# Altium PCB УШЯИ 758725.629-2.PcbDoc (part 1 of 2)
Units mm, origin at the board's own origin, x right, y up, seen from the top; angles counter-clockwise.
Board outline 110 x 150 mm, 2 copper layers (Top Layer, Bottom Layer), stack 1.569 mm thick; 205 components, 137 nets, 716 pads, 161 vias.
Unrouted connection lines stored in the file: 8.
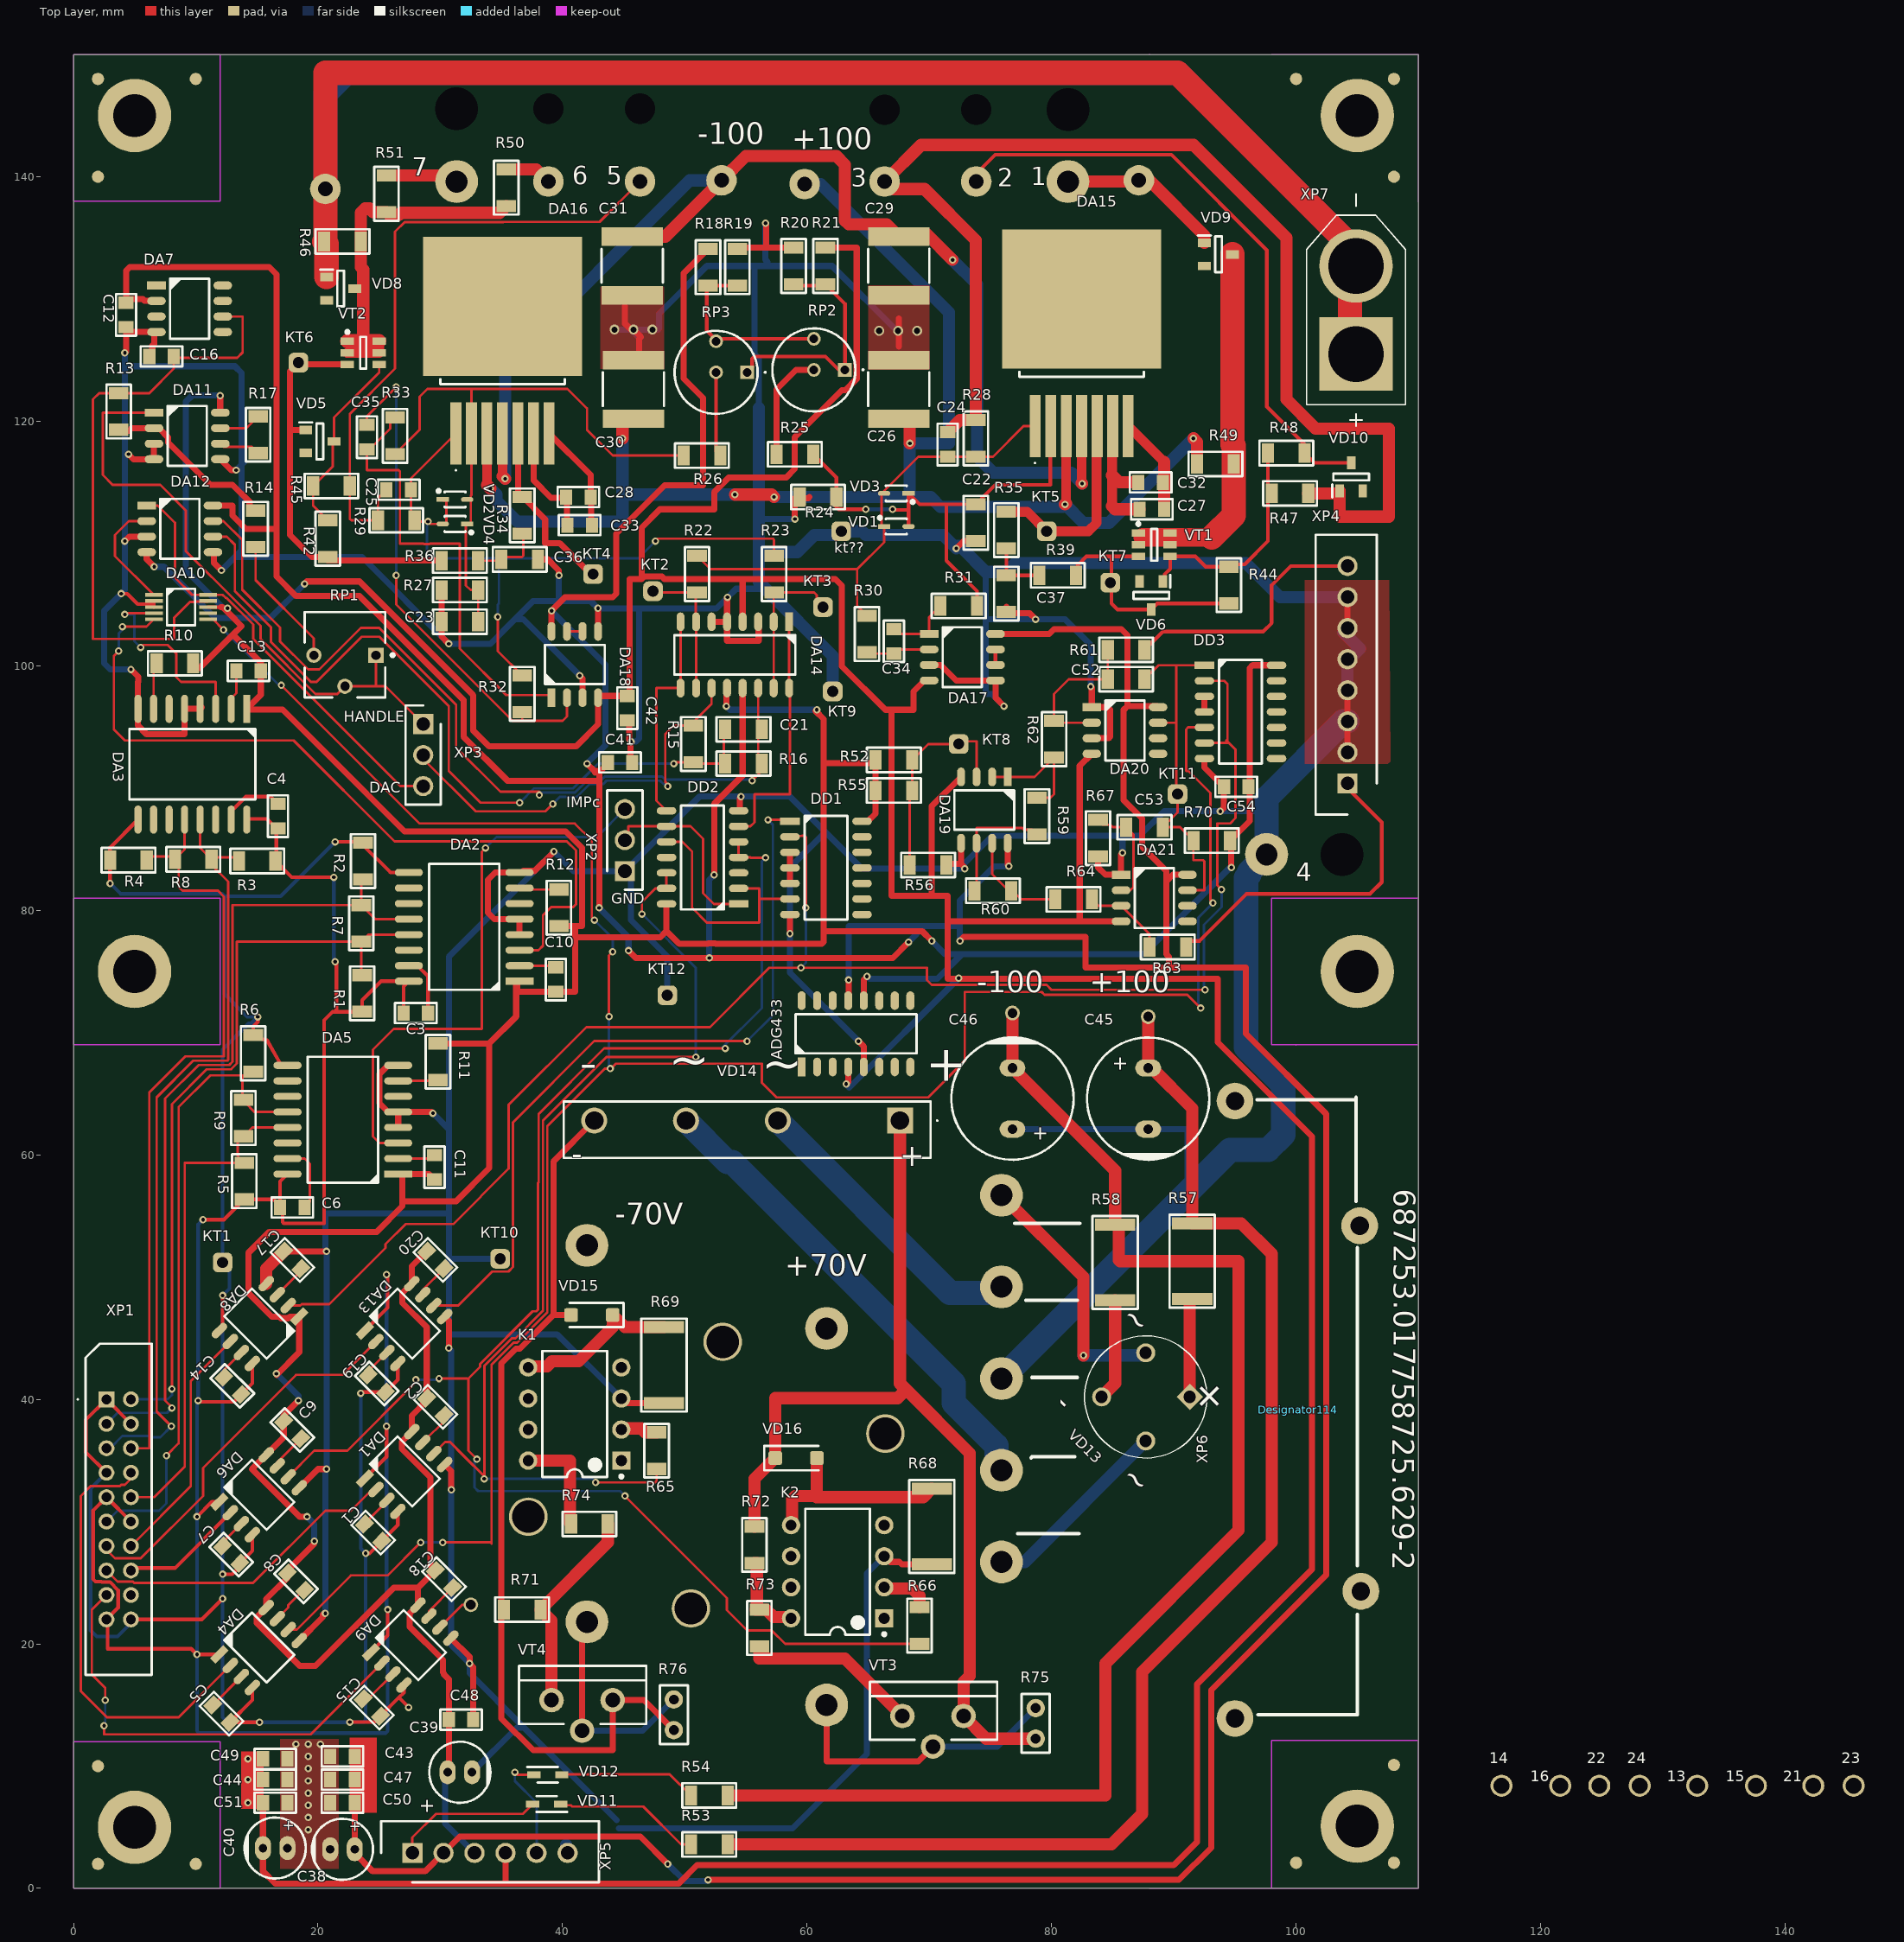
[diagram p0: Top Layer view]
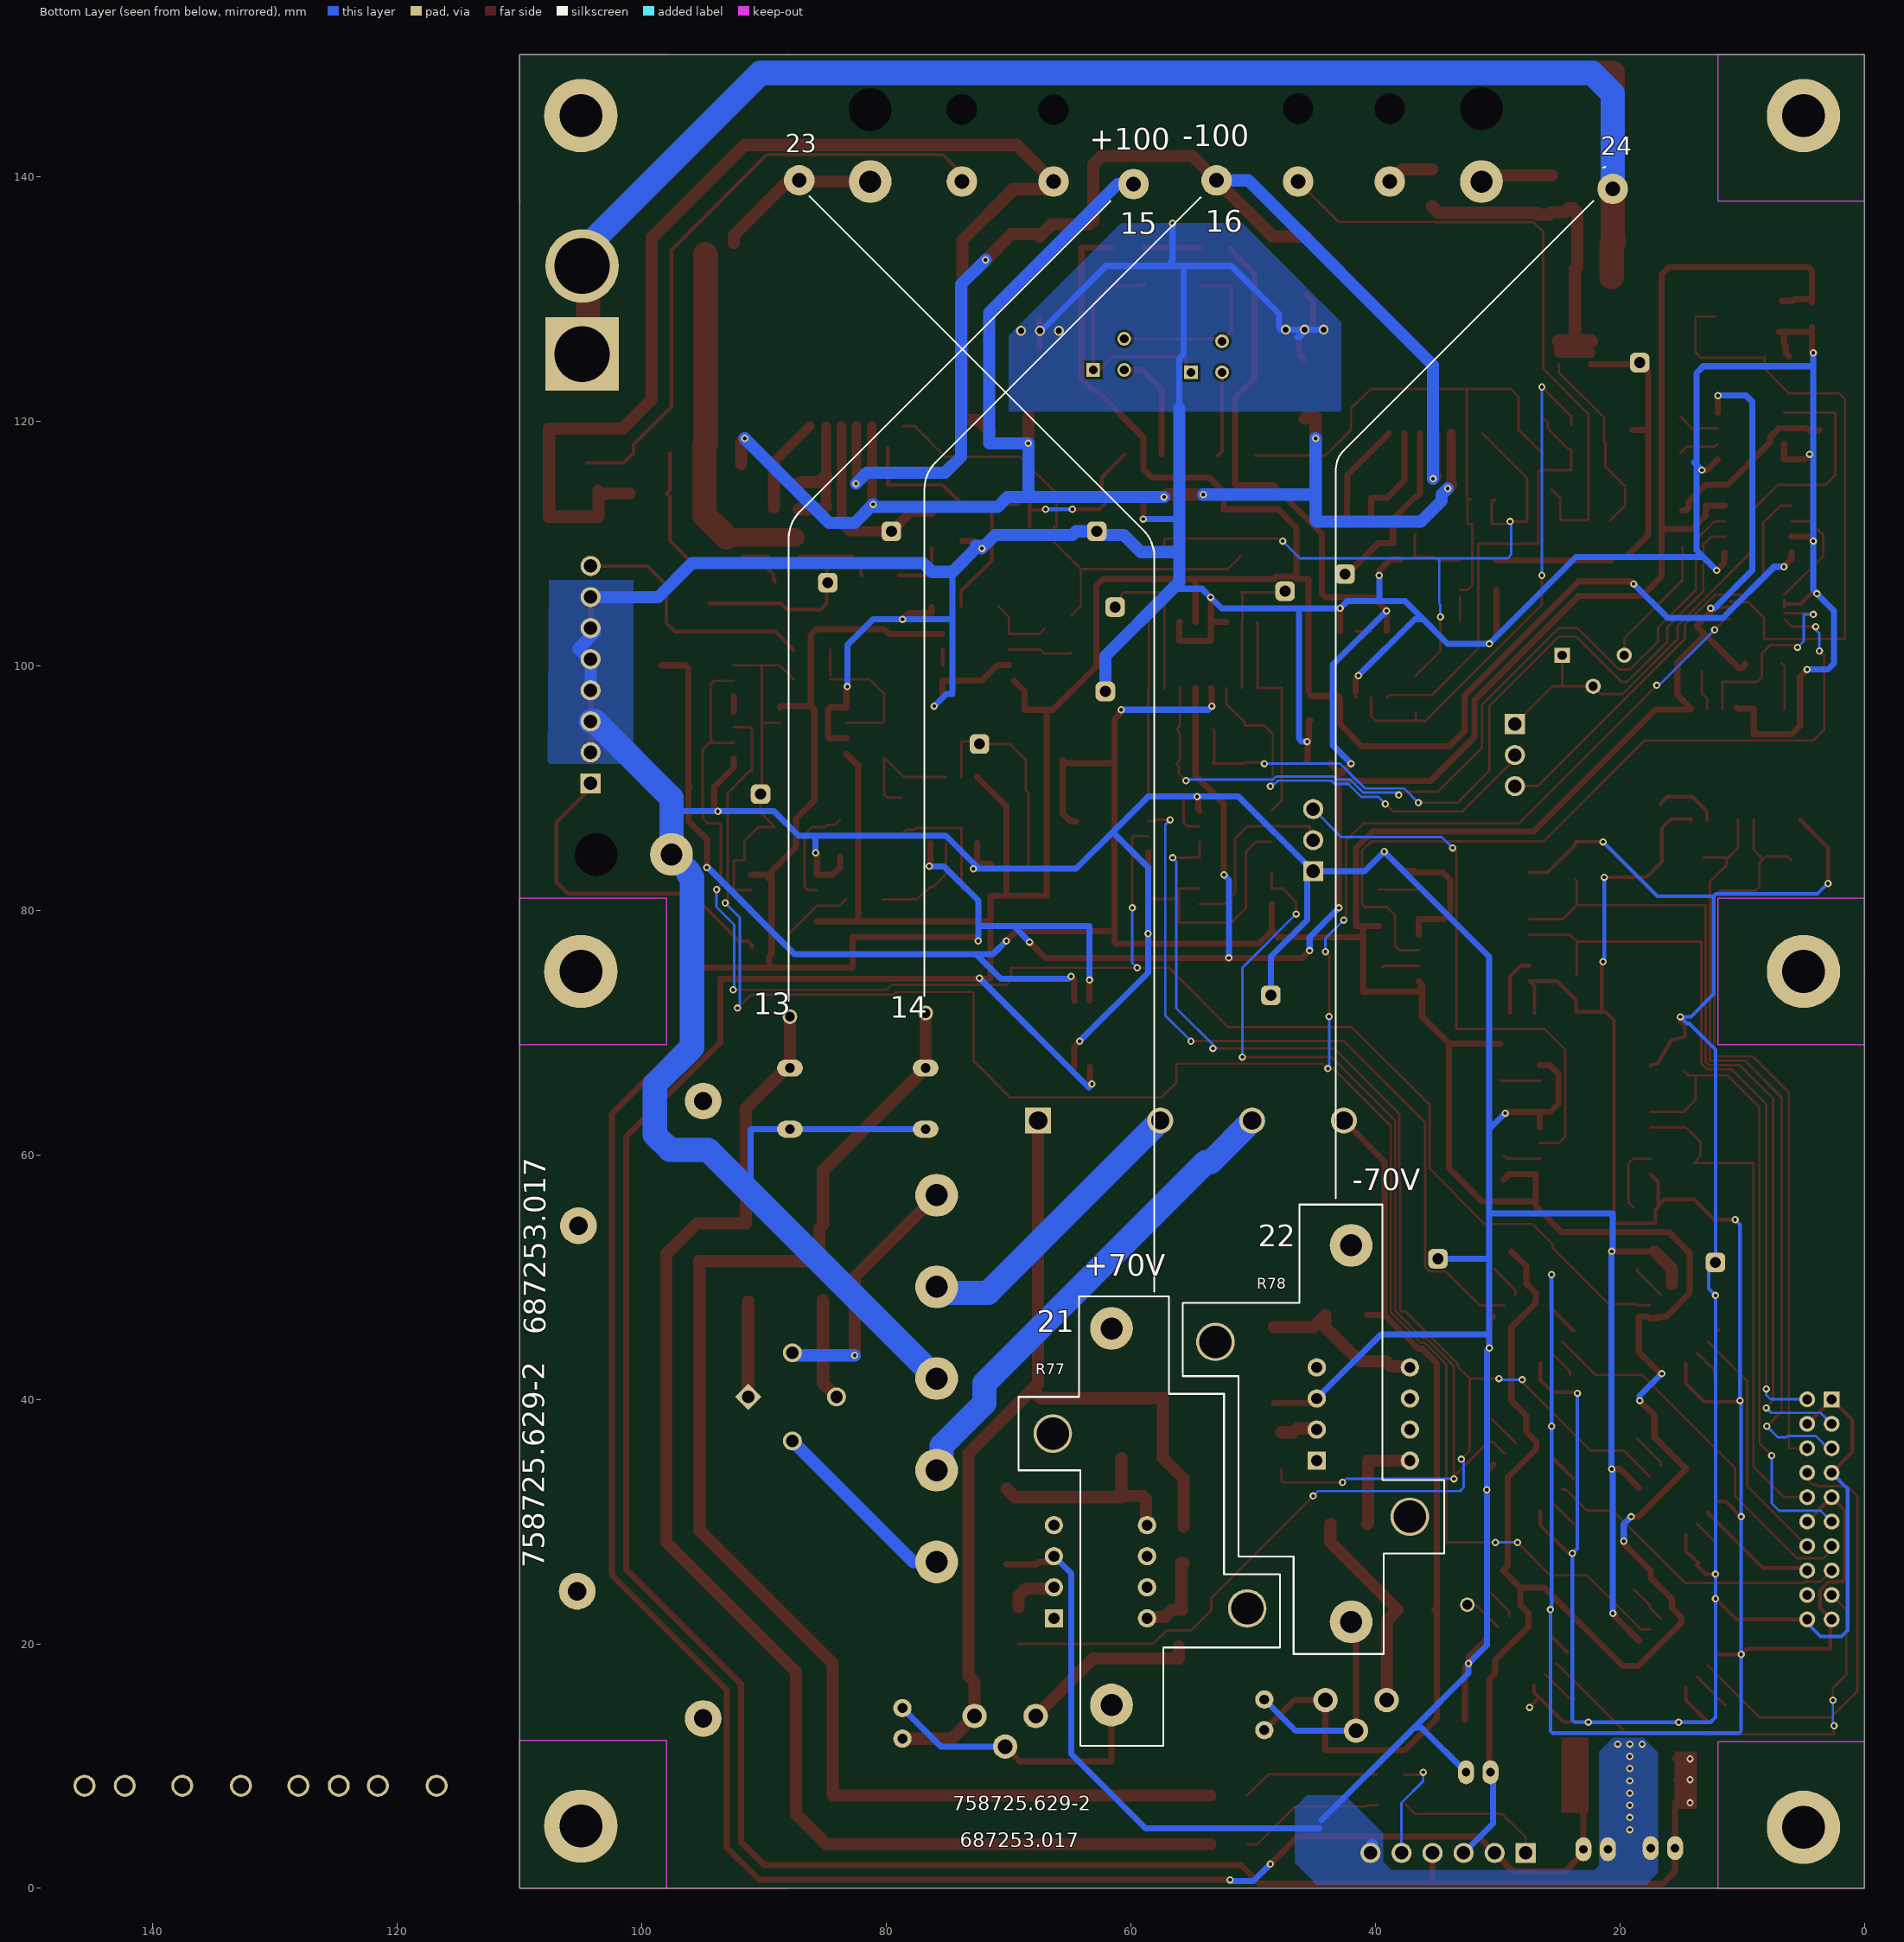
[diagram p1: Bottom Layer view, seen from below]
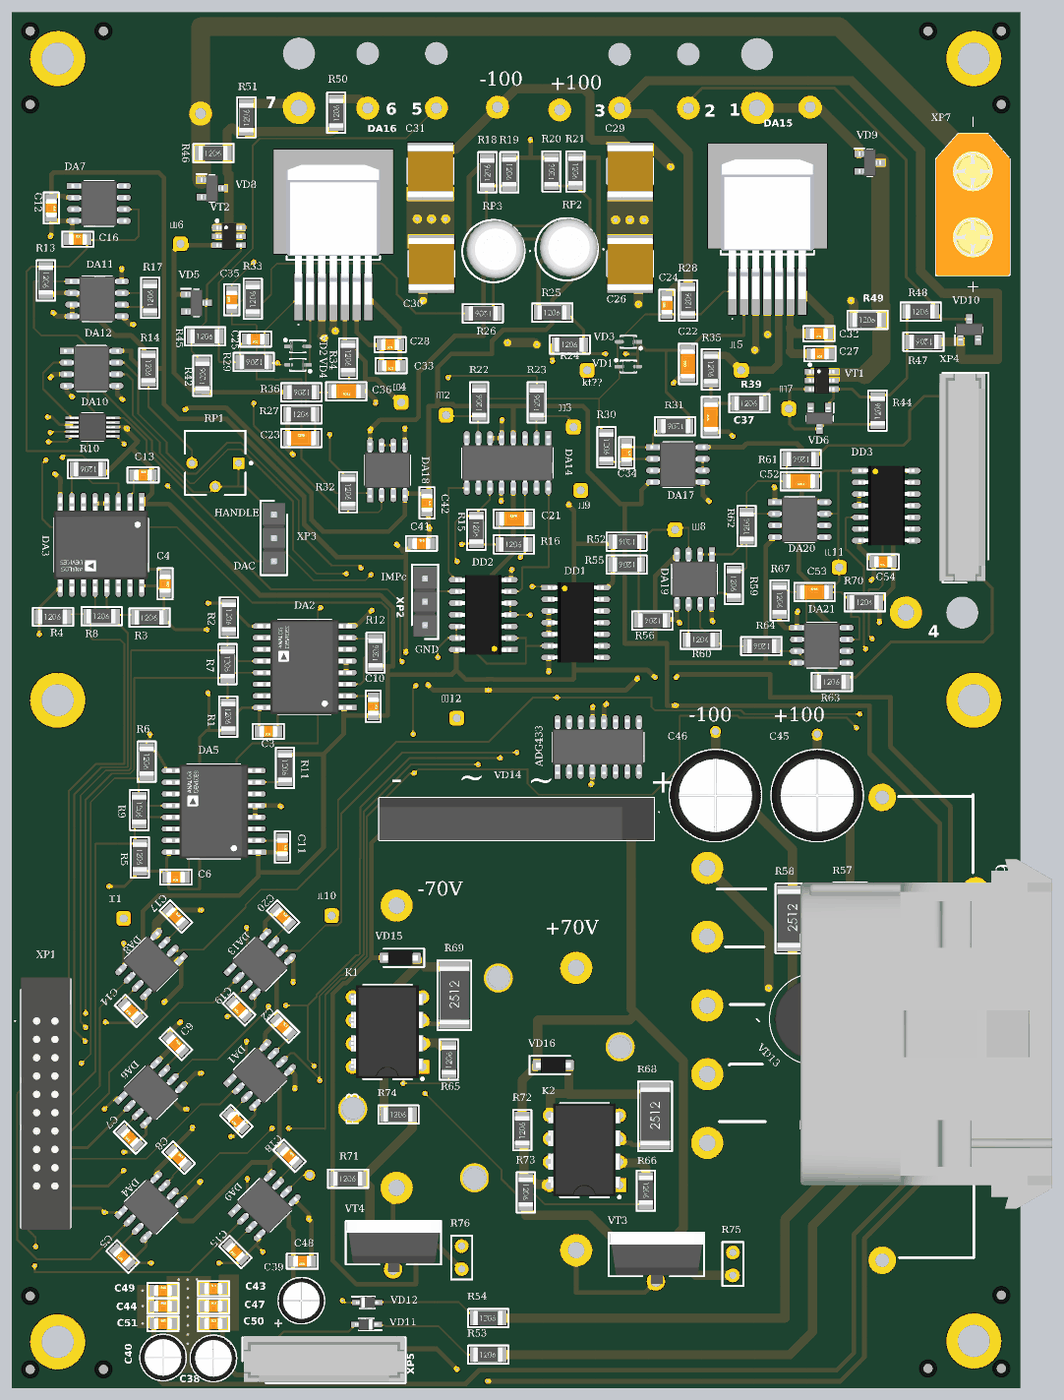
[diagram p3: 3D render of the assembled board from above, using the file's embedded part models]

## Layer stack, top to bottom
Top Solder: solder mask 0.0254, SM-001, Dk 4
Top Layer: signal copper 0.035
Dielectric 1: core 1.4986, Core-043, Dk 4.3
Bottom Layer: signal copper 0.035
Bottom Solder: solder mask 0.0254, SM-001, Dk 4

## Board outline
0,0 110,0 110,150 0,150

## Design rules (kind name [scope] priority, off if disabled: settings)
Clearance Clearance_1 [(InNet('-100') or InNet('-70') or InNet('+70') or InNet('+100'))] p1: gap=0.7 ignorepadtopadclearanceinfootprint=TRUE except(0.5: Arc-SMDPad Arc-THPad Track-SMDPad Track-THPad SMDPad-SMDPad SMDPad-THPad THPad-THPad)
Clearance Clearance_3 [InComponent('DA10')] p2: gap=0.2 ignorepadtopadclearanceinfootprint=TRUE
Clearance Clearance_2 [(InNet('+3.3n') or InNet('-15') or InNet('+5') or InNet('+15') or InNet('+5n'))] p3: gap=0.5 ignorepadtopadclearanceinfootprint=TRUE except(0.3: Arc-SMDPad Track-SMDPad)
Clearance [All] p4: gap=0.15 ignorepadtopadclearanceinfootprint=TRUE except(0.2: Arc-Fill Arc-Poly Arc-Region Track-Fill Track-Poly Track-Region SMDPad-Fill SMDPad-Poly SMDPad-Region THPad-Fill THPad-Poly THPad-Region Via-Fill Via-Poly Via-Region Fill-Fill Fill-Poly Fill-Region Poly-Poly Poly-Region Region-Region)
Height [All] p1: minheight=0 maxheight=40 prefheight=12.7
HoleSize [All] p1: absolutevalues=TRUE maxlimit=5 minlimit=0.025 maxpercent=80.000 minpercent=20.000
MinimumSolderMaskSliver [All] p1: minsoldermaskwidth=0.1
PlaneClearance [All] p1: clearance=0.5
PlaneConnect [All] p1: planeconnectstyle=Direct reliefexpansion=0.508 reliefentries=4 reliefconductorwidth=0.254 reliefairgap=0.254
PolygonConnect [All] p1: connectstyle=Direct reliefconductorwidth=0.254 reliefentries=4 polygonreliefangle="90 Angle" airgapwidth=0.254
RoutingVias [All] p1: holewidth=0.3 width=0.6 viastyle="Through Hole" minholewidth=0.3 minwidth=0.6 maxholewidth=0.8 maxwidth=1.5
SilkToSilkClearance [All] p1: silktosilkclearance=0.1
SilkToSolderMaskClearance [IsPad] p1: minsilkscreentomaskgap=0.1 clearancetoexposedcopper=TRUE
SolderMaskExpansion [All] p1: expansion=0.102 istentingtop=FALSE
SupplyNets "Schematic Supply Nets_28" [InNet('-100V')] p1: voltage=0.000
SupplyNets "Schematic Supply Nets_27" [InNet('+100V')] p2: voltage=0.000
SupplyNets "Schematic Supply Nets_22" [InNet('-70V')] p3: voltage=0.000
SupplyNets "Schematic Supply Nets_13" [InNet('+70V')] p4: voltage=0.000
SupplyNets "Schematic Supply Nets_9" [InNet('+15V')] p5: voltage=0.000
SupplyNets "Schematic Supply Nets_4" [InNet('-15V')] p6: voltage=0.000
SupplyNets "Schematic Supply Nets_35" [InNet('+5V')] p7: voltage=0.000
SupplyNets "Schematic Supply Nets_34" [InNet('+3.3Vn')] p8: voltage=0.000
SupplyNets "Schematic Supply Nets_31" [InNet('70+')] p9: voltage=0.000
SupplyNets "Schematic Supply Nets_30" [InNet('LIMITn')] p10: voltage=0.000
SupplyNets "Schematic Supply Nets_26" [InNet('IMPc')] p11: voltage=0.000
SupplyNets "Schematic Supply Nets_25" [InNet('50E+')] p12: voltage=0.000
SupplyNets "Schematic Supply Nets_24" [InNet('LM+')] p13: voltage=0.000
SupplyNets "Schematic Supply Nets_23" [InNet('CLK_DA2')] p14: voltage=0.000
SupplyNets "Schematic Supply Nets_21" [InNet('GNDN')] p15: voltage=0.000
SupplyNets "Schematic Supply Nets_20" [InNet('-100')] p16: voltage=0.000
SupplyNets "Schematic Supply Nets_19" [InNet('OVLI,2n')] p17: voltage=0.000
SupplyNets "Schematic Supply Nets_18" [InNet('OVLI,2')] p18: voltage=0.000
SupplyNets "Schematic Supply Nets_17" [InNet('DAT_DA2')] p19: voltage=0.000
SupplyNets "Schematic Supply Nets_16" [InNet('ENB_DA2')] p20: voltage=0.000
SupplyNets "Schematic Supply Nets_15" [InNet('50En+')] p21: voltage=0.000
SupplyNets "Schematic Supply Nets_14" [InNet('S-')] p22: voltage=0.000
SupplyNets "Schematic Supply Nets_11" [InNet('50En-')] p23: voltage=0.000
SupplyNets "Schematic Supply Nets_10" [InNet('EIMPn')] p24: voltage=0.000
SupplyNets "Schematic Supply Nets_8" [InNet('GND')] p25: voltage=0.000
SupplyNets "Schematic Supply Nets_7" [InNet('LIMIT')] p26: voltage=0.000
SupplyNets "Schematic Supply Nets_6" [InNet('+100')] p27: voltage=0.000
SupplyNets "Schematic Supply Nets_5" [InNet('LM-')] p28: voltage=0.000
SupplyNets "Schematic Supply Nets_2" [InNet('S+')] p29: voltage=0.000
SupplyNets "Schematic Supply Nets_1" [InNet('70-')] p30: voltage=0.000
SupplyNets "Schematic Supply Nets" [InNet('50E-')] p31: voltage=0.000
Width [All] p1: maxlimit=2 minlimit=0.2 preferedwidth=0.3
23 further rules are at their usual default settings.

## Classes and differential pairs
component class УШЯИ687253.017Э3_3: 8 9 10 11 12 13 14 15 16 21 22 23 24 C38 C39 C40 C41 C42 C43 C44 C45 C46 C47 C48 C49 C50 C51 C52 C53 C54 DA19 DA20 DA21 DD3 K1 K2 R52 R53 R54 R55 R56 R57 R58 R59 R60 R61 R62 R63 R64 R65 R66 R67 R68 R69 R70 R71 R72 R73 R74 R75 R76 R77 R78 VD11 VD12 VD13 VD14 VD15 VD16 VT3 VT4 XP4 XP5 XP6 XP7 XS3 КТ8 КТ9 КТ10 КТ11 КТ12
component class УШЯИ687253.017Э3_2: 1 2 3 4 5 6 7 C22 C23 C24 C25 C26 C27 C28 C29 C30 C31 C32 C33 C34 C35 C36 C37 DA15 DA16 DA17 DA18 R18 R19 R20 R21 R22 R23 R24 R25 R26 R27 R28 R29 R32 R33 R34 R35 R36 R39 R42 R44 R45 R46 R47 R48 R49 R50 R51 RP2 RP3 VD1 VD2 VD3 VD4 VD5 VD6 VD8 VD9 VD10 VT1 VT2 w КТ2 КТ3 КТ4 КТ5 КТ6 КТ7
component class УШЯИ687253.017Э3_1: C C1 C2 C3 C4 C5 C6 C7 C8 C9 C10 C11 C12 C13 C14 C15 C16 C17 C18 C19 C20 C21 DA1 DA2 DA3 DA4 DA5 DA6 DA7 DA8 DA9 DA10 DA11 DA12 DA13 DA14 DD1 DD2 R1 R2 R3 R4 R5 R6 R7 R8 R9 R10 R11 R12 R13 R14 R15 R16 R17 RP1 XP1 XP2 XP3 XS1 XS2 КТ1

## Components (designator, comment, footprint, x,y, rotation, side; value= is the part's Value field where it differs from the comment)
13 "OTV13" OTV13 132.8,8.4 r90 top
14 "OTV13" OTV13 116.8,8.4 r0 top
15 "OTV13" OTV13 137.6,8.4 r90 top
16 "OTV13" OTV13 121.6,8.4 r90 top
21 "OTV13" OTV13 142.3,8.4 r90 top
22 "OTV13" OTV13 124.8,8.4 r0 top
23 "OTV13" OTV13 145.6,8.4 r0 top
24 "OTV13" OTV13 128.1,8.4 r0 top
ADG433 "Comment" 16-SOIC 64,69.9 r90 top
C1 "0805-X7R-25 В-0,1 мкФ +-10%" "CAP: 0805" 24.5,29.1 r135 top value="0,1 мкФ"
C2 "0805-X7R-25 В-0,1 мкФ +-10%" "CAP: 0805" 29.6,39.4 r315 top value="0,1 мкФ"
C3 "0805-X7R-25 В-0,1 мкФ +-10%" "CAP: 0805" 28,71.6 r180 top value="0,1 мкФ"
C4 "0805-X7R-25 В-0,1 мкФ +-10%" "CAP: 0805" 16.724,87.703 r270 top value="0,1 мкФ"
C5 "0805-X7R-25 В-0,1 мкФ +-10%" "CAP: 0805" 12.1,14.3 r135 top value="0,1 мкФ"
C6 "0805-X7R-25 В-0,1 мкФ +-10%" "CAP: 0805" 17.9,55.7 r180 top value="0,1 мкФ"
C7 "0805-X7R-25 В-0,1 мкФ +-10%" "CAP: 0805" 12.9,27.3 r135 top value="0,1 мкФ"
C8 "0805-X7R-25 В-0,1 мкФ +-10%" "CAP: 0805" 18.2,25.1 r315 top value="0,1 мкФ"
C9 "0805-X7R-25 В-0,1 мкФ +-10%" "CAP: 0805" 17.9,37.5 r315 top value="0,1 мкФ"
C10 "0805-X7R-25 В-0,1 мкФ +-10%" "CAP: 0805" 39.449,74.334 r270 top value="0,1 мкФ"
C11 "0805-X7R-25 В-0,1 мкФ +-10%" "CAP: 0805" 29.526,58.984 r270 top value="0,1 мкФ"
C12 "0805-X7R-25 В-0,1 мкФ +-10%" "CAP: 0805" 4.3,128.7 r270 top value="0,1 мкФ"
C13 "0805-X7R-25 В-0,1 мкФ +-10%" "CAP: 0805" 14.32,99.583 r0 top value="0,1 мкФ"
C14 "0805-X7R-25 В-0,1 мкФ +-10%" "CAP: 0805" 13,41.1 r135 top value="0,1 мкФ"
C15 "0805-X7R-25 В-0,1 мкФ +-10%" "CAP: 0805" 24.4,14.8 r135 top value="0,1 мкФ"
C16 "0805-X7R-25 В-0,1 мкФ +-10%" "CAP: 0805" 7.2,125.3 r0 top value="0,1 мкФ"
C17 "0805-X7R-25 В-0,1 мкФ +-10%" "CAP: 0805" 17.9,51.4 r315 top value="0,1 мкФ"
C18 "0805-X7R-25 В-0,1 мкФ +-10%" "CAP: 0805" 30.3,25.3 r315 top value="0,1 мкФ"
C19 "0805-X7R-25 В-0,1 мкФ +-10%" "CAP: 0805" 24.807,41.293 r135 top value="0,1 мкФ"
C20 "0805-X7R-25 В-0,1 мкФ +-10%" "CAP: 0805" 29.6,51.4 r315 top value="0,1 мкФ"
C21 "1206-C0G-50 В-22 пФ +-5%" "CAP: 1206" 54.8,94.8 r0 top value="22 пФ"
C22 "1206-X7R-50 B-100 пФ+-10%" "CAP: 1206" 73.8,111.7 r90 top value="100 пФ"
C23 "1206-X7R-50 B-100 пФ+-10%" "CAP: 1206" 31.6,103.6 r0 top value="100 пФ"
C24 "0805-C0G-250 В-10 пФ +-5%" "CAP: 0805" 71.5,118.1 r90 top value="10 пФ"
C25 "0805-C0G-250 В-10 пФ +-5%" "CAP: 0805" 26.6,114.4 r180 top value="10 пФ"
C26 "2220-X7R-250 В-1 мкФ +-10%" "CAP: 2220" 67.5,125 r0 top value="1 мкФ"
C27 "0805-C0G-250 В-10 пФ +-5%" "CAP: 0805" 88.2,112.8 r180 top value="10 пФ"
C28 "0805-C0G-250 В-10 пФ +-5%" "CAP: 0805" 41.3,113.8 r180 top value="10 пФ"
C29 "2220-X7R-250 В-1 мкФ +-10%" "CAP: 2220" 67.5,135.1 r0 top value="1 мкФ"
C30 "2220-X7R-250 В-1 мкФ +-10%" "CAP: 2220" 45.8,125 r0 top value="1 мкФ"
C31 "2220-X7R-250 В-1 мкФ +-10%" "CAP: 2220" 45.7,135.1 r0 top value="1 мкФ"
C32 "0805-C0G-250 В-10 пФ +-5%" "CAP: 0805" 88.1,115 r180 top value="10 пФ"
C33 "0805-C0G-250 В-10 пФ +-5%" "CAP: 0805" 41.4,111.5 r180 top value="10 пФ"
C34 "0805-X7R-25 В-1 мкФ +-10%" "CAP: 0805" 67.1,102 r270 top value="1 мкФ"
C35 "0805-X7R-25 В-1 мкФ +-10%" "CAP: 0805" 24,118.7 r90 top value="1 мкФ"
C36 "220пФ NP0 1000В 5% 1206" "CAP: 1206" 36.5,108.7 r180 top value=220пФ
C37 "220пФ NP0 1000В 5% 1206" "CAP: 1206" 76.3,105.9 r90 top value=220пФ
C38 "ECR4R7M50B" "CAP TH ALUM ELEC D5.00mm S2.00mm H11.00mm" 22,3.2 r0 top value="4,7 мкФ"
C39 "ECR4R7M50B" "CAP TH ALUM ELEC D5.00mm S2.00mm H11.00mm" 31.6,9.5 r180 top value="4,7 мкФ"
C40 "ECR4R7M50B" "CAP TH ALUM ELEC D5.00mm S2.00mm H11.00mm" 16.5,3.3 r0 top value="4,7 мкФ"
C41 "0805-X7R-25 В-0,33 мкФ +-10%" "CAP: 0805" 44.7,92.1 r0 top value="0,33 мкФ"
C42 "0805-X7R-25 В-0,33 мкФ +-10%" "CAP: 0805" 45.3,96.534 r270 top value="0,33 мкФ"
C43 "0805-X7R-25 В-0,33 мкФ +-10%" "CAP: 0805" 22,10.8 r0 top value="0,33 мкФ"
C44 "0805-X7R-25 В-0,33 мкФ +-10%" "CAP: 0805" 16.5,8.9 r0 top value="0,33 мкФ"
C45 "KM220M2EBKJ1020VBK" "CAP TH ALUM ELEC D10.00mm S5.00mm H20.00mm" 87.9,64.6 r90 top
C46 "KM220M2EBKJ1020VBK" "CAP TH ALUM ELEC D10.00mm S5.00mm H20.00mm" 76.8,64.6 r270 top
C47 "0805-X7R-25 В-0,33 мкФ +-10%" "CAP: 0805" 22,8.9 r0 top value="0,33 мкФ"
C48 "0805-X7R-25 В-0,33 мкФ +-10%" "CAP: 0805" 31.7,13.8 r180 top value="0,33 мкФ"
C49 "0805-X7R-25 В-0,33 мкФ +-10%" "CAP: 0805" 16.5,10.6 r0 top value="0,33 мкФ"
C50 "0805-X7R-25 В-0,33 мкФ +-10%" "CAP: 0805" 22,7 r0 top value="0,33 мкФ"
C51 "0805-X7R-25 В-0,33 мкФ +-10%" "CAP: 0805" 16.5,7 r0 top value="0,33 мкФ"
C52 "1206-X7R-50 B-22 пФ+-10%" "CAP: 1206" 86.1,98.9 r180 top value="2,2 пФ"
C53 "1206-X7R-50 B-22 пФ+-10%" "CAP: 1206" 87.6,86.8 r0 top value="2,2 пФ"
C54 "0805-X7R-25 В-0,33 мкФ +-10%" "CAP: 0805" 95.1,90.1 r180 top value="0,33 мкФ"
DA1 "ADuM1100AR" 8-SOIC 27.1,34.1 r45 top
DA2 "ADM2486BRWZ" 16-SOIC-W 36.484,74.201 r180 top
DA3 "ADM2486BRWZ" 16-SOIC-W 14.17,96.476 r270 top
DA4 "ADuM1100AR" 8-SOIC 15.2,19.7 r45 top
DA5 "ADM2486BRWZ" 16-SOIC-W 26.562,58.427 r180 top
DA6 "ADuM1100AR" 8-SOIC 15.2,32.2 r45 top
DA7 "ADR435BRZ" 8-SOIC 9.499,129.202 r0 top
DA8 "ADuM1100AR" 8-SOIC 15.2,46.2 r225 top
DA9 "ADuM1100AR" 8-SOIC 27.6,19.9 r45 top
DA10 "AD5443YRM" 10-MSOP 8.8,104.8 r0 top
DA11 "ADA4084-2ARZ" 8-SOIC 9.3,118.8 r0 top
DA12 "ADA4084-2ARZ" 8-SOIC 8.7,111.2 r0 top
DA13 "ADuM1100AR" 8-SOIC 27.1,46.2 r45 top
DA14 "ADG433BR" 16-SOIC 54.095,100.888 r270 top
DA15 "PA340CC" 7-DDPAC 82.46,127.838 r0 top
DA16 "PA340CC" 7-DDPAC 35.09,127.238 r0 top
DA17 "TLV9152IDR" 8-SOIC 72.7,100.7 r0 top
DA18 "TLV9152IDR" 8-SOIC 41,100.1 r90 top
DA19 "ADA4084-2ARZ" 8-SOIC 74.5,88.2 r270 top
DA20 "IL311D" 8-SOIC 86,94.706 r0 top
DA21 "IL311D" 8-SOIC 88.4,81 r0 top
DD1 "IN74HC00AD" 14-soic 58.6,87.28 r0 top
DD2 "IN74HC20D" 14-SOIC 54.4,80.52 r180 top
DD3 "IN74HC00AD" 14-soic 92.5,100.04 r0 top
Designator114 "Comment" 745312.362 95.2,38.8 r0 top
K1 "TLP3549F" 8-DIP 41,38.8 r180 top
K2 "TLP3549F" 8-DIP 62.5,25.9 r180 top
kt?? "Лепесток" LEPESTOK7750224 62.8,111 r0 top
R1 "1206-1 кОм+-5%" 1206 23.61,73.203 r270 top value="1 кОм"
R2 "1206-1 кОм+-5%" 1206 23.68,84.021 r270 top value="1 кОм"
R3 "1206-1 кОм+-5%" 1206 15.027,84.026 r0 top value="1 кОм"
R4 "1206-1 кОм+-5%" 1206 4.491,84.097 r0 top value="1 кОм"
R5 "1206-1 кОм+-5%" 1206 13.97,57.853 r270 top value="1 кОм"
R6 "1206-1 кОм+-5%" 1206 14.7,68.3 r270 top value="1 кОм"
R7 "1206-100 Ом+-5%" 1206 23.539,78.93 r270 top value="100 Ом"
R8 "1206-100 Ом+-5%" 1206 9.794,84.168 r0 top value="100 Ом"
R9 "1206-100 Ом+-5%" 1206 13.899,63.015 r270 top value="100 Ом"
R10 "1206-12 кОм+-5%" 1206 8.3,100.2 r180 top value="12 кОм"
R11 "1206-12 кОм+-5%" 1206 29.809,67.611 r270 top value="12 кОм"
R12 "1206-12 кОм+-5%" 1206 39.7,80.2 r90 top value="12 кОм"
R13 "1206-10 кОм+-0,5%" 1206 3.7,120.8 r270 top value="10 кОм"
R14 "1206-100 Ом+-0,5%" 1206 14.9,111.2 r270 top value="100 Ом"
R15 "1206-10 кОм+-0,5%" 1206 50.7,93.6 r270 top value="10 кОм"
R16 "1206-10 кОм+-0,5%" 1206 54.8,92 r0 top value="10 кОм"
R17 "1206-12 кОм+-1%" 1206 15.1,118.9 r90 top value="12 кОм"
R18 "1206-15 кОм+-5%" 1206 51.9,132.6 r90 top value="15 кОм"
R19 "1206-51 Ом+-5%" 1206 54.3,132.6 r270 top value="51 Ом"
R20 "1206-51 Ом+-5%" 1206 58.9,132.7 r90 top value="51 Ом"
R21 "1206-51 кОм+-5%" 1206 61.5,132.7 r270 top value="51 кОм"
R22 "1206-2 кОм+-0.5%" 1206 51,107.5 r90 top value="2 кОм"
R23 "1206-2 кОм+-0.5%" 1206 57.3,107.5 r90 top value="2 кОм"
R24 "1206-1 кОм+-5%" 1206 60.9,113.8 r0 top value="1 кОм"
R25 "1206-20 кОм+-0.5%" 1206 59,117.3 r0 top value="20 кОм"
R26 "1206-20 кОм+-0.5%" 1206 51.4,117.2 r180 top value="20 кОм"
R27 "1206-75 кОм+-5%" 1206 31.6,106.2 r0 top value="75 кОм"
R28 "1206-20 кОм+-0.5%" 1206 73.8,118.6 r90 top value="20 кОм"
R29 "1206-20 кОм+-0.5%" 1206 26.4,111.9 r180 top value="20 кОм"
R30 "1206-100 кОм+-5%" 1206 64.9,102.6 r270 top value="100 кОм"
R31 "1206-100 кОм+-5%" 1206 72.4,104.9 r180 top value="100 кОм"
R32 "1206-100 кОм+-5%" 1206 36.7,97.7 r270 top value="100 кОм"
R33 "1206-100 кОм+-5%" 1206 26.3,118.8 r90 top value="100 кОм"
R34 "1206-240 Ом+-5%" 1206 36.7,112.3 r270 top value="240 Ом"
R35 "1206-1,2 кОм+-5%" 1206 76.3,111.1 r270 top value="1,2 кОм"
R36 "1206-240 Ом+-5%" 1206 31.6,108.6 r180 top value="240 Ом"
R39 "1206-1,2 кОм+-5%" 1206 80.5,107.4 r0 top value="1,2 кОм"
R42 "1206-2,4 кОм+-5%" 1206 20.8,110.4 r90 top value="2,4 кОм"
R44 "1206-2,4 кОм+-5%" 1206 94.5,106.6 r90 top value="2,4 кОм"
R45 "1206-180 Ом+-5%" 1206 21.1,114.7 r0 top value="180 Ом"
R46 "1206-100 Ом+-5%" 1206 22,134.7 r0 top value="100 Ом"
R47 "1206-1 кОм+-5%" 1206 99.5,114.1 r180 top value="1 кОм"
R48 "1206-51 Ом+-5%" 1206 99.2,117.4 r0 top value="51 Ом"
R49 "1206-10 Ом+-5%" 1206 93.4,116.5 r0 top value="10 Ом"
R50 "1206-10 Ом+-5%" 1206 35.4,139.1 r90 top value="10 Ом"
R51 "1206-10 Ом+-5%" 1206 25.6,138.6 r90 top value="10 Ом"
R52 "1206-15 кОм+-5%" 1206 67.1,92.3 r180 top value="15 кОм"
R53 "1206-12 кОм+-5%" 1206 52,3.6 r0 top value="12 кОм"
R54 "1206-12 кОм+-5%" 1206 52,7.6 r0 top value="12 кОм"
R55 "1206-6,98 кОм+-1%" 1206 67.1,89.8 r180 top value="6,98 кОм"
R56 "1206-1 кОм+-5%" 1206 69.9,83.7 r180 top value="1 кОм"
R57 "2512-1,2 кОм+-5%" 2512 91.5,51.3 r90 top value="1,2 кОм"
R58 "2512-1,2 кОм+-5%" 2512 85.2,51.2 r90 top value="1,2 кОм"
R59 "1206-2 кОм+-0.5%" 1206 78.8,87.7 r270 top value="2 кОм"
R60 "1206-2 кОм+-0.5%" 1206 75.2,81.6 r0 top value="2 кОм"
R61 "1206-240 Ом+-5%" 1206 86.1,101.3 r180 top value="240 Ом"
R62 "1206-240 Ом+-5%" 1206 80.2,94 r90 top value="240 Ом"
R63 "1206-240 Ом+-5%" 1206 89.5,77 r0 top value="240 Ом"
R64 "1206-240 Ом+-5%" 1206 81.8,80.9 r180 top value="240 Ом"
R65 "1206-430 Ом+-5%" 1206 47.7,35.8 r90 top value="430 Ом"
R66 "1206-430 Ом+-5%" 1206 69.2,21.5 r270 top value="430 Ом"
R67 "1206-150 Ом+-5%" 1206 83.8,85.9 r270 top value="150 Ом"
R68 "2512-5,6 кОм+-5%" 2512 70.2,29.6 r90 top value="5,6 кОм"
R69 "2512-5,6 кОм+-5%" 2512 48.3,42.8 r90 top value="5,6 кОм"
R70 "1206-2 кОм+-5%" 1206 93.1,85.7 r0 top value="2 кОм"
R71 "1206-51 кОм+-5%" 1206 36.7,22.8 r0 top value="51 кОм"
R72 "1206-51 кОм+-5%" 1206 55.7,28.1 r90 top value="51 кОм"
R73 "1206-390 Ом+-5%" 1206 56.1,21.3 r270 top value="390 Ом"
R74 "1206-390 Ом+-5%" 1206 42.2,29.8 r0 top value="390 Ом"
R75 "W21-3W-680 Ом +-5%" "С2-33Н-0,25АИ (220.03.0401.00.00)" 78.7,13.5 r90 top
R76 "W21-3W-680 Ом +-5%" "С2-33Н-0,25АИ (220.03.0401.00.00)" 49.1,14.2 r90 top
R77 "HS15-4R7-J" HS15 66.4,37.2 r270 bottom locked value="4,7 Ом"
R78 "HS15-4R7-J" HS15 37.2,30.4 r90 bottom locked value="4,7 Ом"
RP1 "3362P-1-103LF" BOUR-3362P 22.2,100.9 r180 top
RP2 "3329H-1-102LF" 3329H 63.1,124.2 r90 top
RP3 "3329H-1-102LF" 3329H 55.1,124 r90 top
VD1 "1N4148WS" SOD-323F 67.3,111.4 r0 top
VD2 "1N4148WS" SOD-323F 31.2,113.6 r0 top
VD3 "1N4148WS" SOD-323F 67.3,114.1 r180 top
VD4 "1N4148WS" SOD-323F 31.2,111.6 r180 top
VD5 "BZX84C15LT1G" SOT-23-3 19,119.3 r0 top
VD6 "BZX84C15LT1G" SOT-23-3 89.1,106.9 r270 top
VD8 "BZX84C15LT1G" SOT-23-3 20.7,131.8 r0 top
VD9 "BZX84C6V2LT1G" SOT-23-3 92.5,134.6 r0 top
VD10 "BZX84C15LT1G" SOT-23-3 103.55,114.3 r90 top
VD11 "1N4007WS" SOD-323 38.7,6.9 r180 top
VD12 "1N4007WS" SOD-323 38.8,9.3 r0 top
VD13 "W04M" WOM 87.7,40.2 r135 top
VD14 "GSIB2540" GSIB-5S 67.6,62.8 r180 top
VD15 "BZT52C10" SOD-123F 42.4,46.9 r180 top
VD16 "BZT52C10" SOD-123F 59.1,35.2 r0 top
VT1 "ZXMN10A08E6TA" SOT-23-6 88.4,109.9 r0 top
VT2 "ZXMP10A17E6TA" SOT-23-6 23.7,125.6 r0 top
VT3 "IRF5210PBF" TO-220(F) 70.3,14.1 r0 top
VT4 "IPA083N10N5XKSA1" TO-220(f) 41.6,15.4 r0 top
XP1 "BH2-20" DS1014-20S 2.7,40 r270 top locked
XP2 "DS1021-1x3" DS1021-1x3S 45.1,83.2 r270 top
XP3 "DS1021-1x3" DS1021-1x3S 28.6,95.24 r90 top
XP4 "280373-2" 280373-2 104.2,90.38 r90 top
XP5 "280372-2" 280372-2 27.72,2.9 r0 top
XP6 "MNL-350810-1" 350810-1 113.5,38.6 r90 top locked
XP7 "XT60-M" AMASS_XT60-M 104.9,129.1 r90 top
КТ1 "Лепесток" LEPESTOK7750224 12.2,51.2 r0 top
КТ2 "Лепесток" LEPESTOK7750224 47.4,106.1 r0 top
КТ3 "Лепесток" LEPESTOK7750224 61.3,104.8 r0 top
КТ4 "Лепесток" LEPESTOK7750224 42.5,107.5 r0 top
КТ5 "Лепесток" LEPESTOK7750224 79.6,111 r90 top
КТ6 "Лепесток" LEPESTOK7750224 18.4,124.8 r0 top
КТ7 "Лепесток" LEPESTOK7750224 84.8,106.8 r180 top
КТ8 "Лепесток" LEPESTOK7750224 72.4,93.6 r0 top
КТ9 "Лепесток" LEPESTOK7750224 62.1,97.9 r0 top
КТ10 "Лепесток" LEPESTOK7750224 34.9,51.5 r0 top
КТ11 "Лепесток" LEPESTOK7750224 90.3,89.5 r180 top
КТ12 "Лепесток" LEPESTOK7750224 48.567,73.05 r0 top (schematic designator КТ?)

## Footprints (in the part's own frame and the unit in brackets; to place one, negate y for a bottom-side part, rotate by r counter-clockwise, add the part's x,y. Pads: shape width x height; smd on the part's side, far side on the other; paste and mask are expansions set on the pad)
7-DDPAC [mm]
  rect 0.89x5.08 smd: 1(-3.81,-8.238) 2(-2.54,-8.238) 3(-1.27,-8.238) 4(0,-8.238) 5(1.27,-8.238) 6(2.54,-8.238) 7(3.81,-8.238)
  rect 13x11.4 smd: 8(0,2.163)
  silkscreen extent -5.09,-11.3 5.09,-3.8, body extent -5.09,-9.07 5.09,6.17, height 4.44
8-DIP [mm] "DIP, 8-Pin, Row Spacing 7.62 mm, Pitch 2.54 mm"
  rect 1.5x1.5 hole 0.9: 1(-3.81,3.81)
  round 1.5 hole 0.9: 2(-3.81,1.27) 3(-3.81,-1.27) 4(-3.81,-3.81) 5(3.81,-3.81) 6(3.81,-1.27) 7(3.81,1.27) 8(3.81,3.81)
  silkscreen extent -3.94,-5.15 2.65,5.23, body extent -3.91,-5.12 3.96,5.04, height 5.33
8-SOIC [mm] "Body 3.9mmx4.9mm 1.27 pitch"
  rect 1.525x0.65 smd: 1(-2.712,1.905)
  oval 1.525x0.65 smd: 2(-2.712,0.635) 3(-2.712,-0.635) 4(-2.712,-1.905) 5(2.712,-1.905) 6(2.712,-0.635) 7(2.712,0.635) 8(2.712,1.905)
  silkscreen extent -1.6,-2.45 1.6,2.45, body extent -3,-2.45 3,2.45, height 1.75
10-MSOP [mm] "3x3 mm, pitch 0.5 mm"
  rect 1.45x0.3 smd: 1(-2.225,1) 2(-2.225,0.5) 3(-2.225,0) 4(-2.225,-0.5) 5(-2.225,-1) 6(2.225,-1) 7(2.225,-0.5) 8(2.225,0) 9(2.225,0.5) 10(2.225,1)
  silkscreen extent -1.15,-1.5 1.15,1.5, body extent -2.45,-1.5 2.45,1.5, height 0.95
14-soic [mm] "Body 8.6x3.9mm, pitch 1.27 mm"
  rect 1.6x0.6 smd: 1(0,0)
  rrect100% 1.6x0.6 smd: 2(0,-1.27) 3(0,-2.54) 4(0,-3.81) 5(0,-5.08) 6(0,-6.35) 7(0,-7.62) 8(5.9,-7.62) 9(5.9,-6.35) 10(5.9,-5.08) 11(5.9,-3.81) 12(5.9,-2.54) 13(5.9,-1.27) 14(5.9,0)
  round 0.5 on Mech13: ""(0.5,0)
  silkscreen extent 1.2,-8.05 4.7,0.45, body extent -0.12,-8.15 6.02,0.55, height 1.78
14-SOIC [mm] "Body 8.6x3.9mm, pitch 1.27 mm"
  rect 1.6x0.6 smd: 1(0,0)
  rrect100% 1.6x0.6 smd: 2(0,-1.27) 3(0,-2.54) 4(0,-3.81) 5(0,-5.08) 6(0,-6.35) 7(0,-7.62) 8(5.9,-7.62) 9(5.9,-6.35) 10(5.9,-5.08) 11(5.9,-3.81) 12(5.9,-2.54) 13(5.9,-1.27) 14(5.9,0)
  round 0.5 on Mech13: ""(0.5,0)
  silkscreen extent 1.2,-8.05 4.7,0.45, body extent -0.12,-8.15 6.02,0.55, height 1.78
16-SOIC [mm] "Body 3.9mm×9.9mm 1.27 pitch"
  rect 1.525x0.65 smd: 1(-2.712,4.445)
  oval 1.525x0.65 smd: 2(-2.712,3.175) 3(-2.712,1.905) 4(-2.712,0.635) 5(-2.712,-0.635) 6(-2.712,-1.905) 7(-2.712,-3.175) 8(-2.712,-4.445) 9(2.712,-4.445) 10(2.712,-3.175) 11(2.712,-1.905) 12(2.712,-0.635) 13(2.712,0.635) 14(2.712,1.905) 15(2.712,3.175) 16(2.712,4.445)
  silkscreen extent -1.6,-4.95 1.6,4.95, body extent -3,-4.95 3,4.95, height 1.75
16-SOIC-W [mil] "RW-16, 16-SOIC WIDE, 1,27 pitch"
  rect 90.47x22.92 smd paste+0: 1(0,0)
  rrect100% 90.47x22.92 smd paste+0: 2(0,-50) 3(0,-100) 4(0,-150) 5(0,-200) 6(0,-250) 7(0,-300) 8(0,-350) 9(356.54,-350) 10(356.54,-300) 11(356.54,-250) 12(356.54,-200) 13(356.54,-150) 14(356.54,-100) 15(356.54,-50) 16(356.54,0)
  silkscreen extent 65,-378 292,28, body extent -55,-388 412,38, height 10
1206 [mm] "Resistor SMD"
  rect 1x1.6 smd: 1(-1.5,0) 2(1.5,0)
  silkscreen extent -2.2,-1 2.2,1, body extent -1.65,-0.8 1.55,0.8, height 0.47
2512 [mm] "Resistor SMD"
  rect 1x3.3 smd: 1(-3.1,0) 2(3.1,0)
  silkscreen extent -3.8,-1.85 3.8,1.85, body extent -3.17,-1.6 3.17,1.6, height 0.52
3329H [mm]
  rect 1.12x1.12 hole 0.71: 1(0,0)
  round 1.12 hole 0.71: 2(0,2.54) 3(2.54,2.54)
  silkscreen extent -3.4,-1.5 3.4,5.94, body extent -2.97,-0.88 3.38,5.48, height 5.07
280372-2 [mm] "AMPMODU 2"
  rect 1.65x1.65 hole 1.1: 1(0,0)
  round 1.65 hole 1.1: 2(2.54,0) 3(5.08,0) 4(7.62,0) 5(10.16,0) 6(12.7,0)
  silkscreen extent -2.55,-2.4 15.25,2.6, body extent -2.41,-2.26 15.11,2.74, height 12.6
280373-2 [mm] "AMPMODU 2"
  rect 1.65x1.65 hole 1.1: 1(0,0)
  round 1.65 hole 1.1: 2(2.54,0) 3(5.08,0) 4(7.62,0) 5(10.16,0) 6(12.7,0) 7(15.24,0) 8(17.78,0)
  silkscreen extent -2.56,-2.4 20.34,2.6, body extent -2.35,-2.06 20.25,2.94, height 12.6
350810-1 [mm]
  body extent -19.05,0 19.05,27.52, height 28.51
745312.362 [mm]
  round 3 hole 1.5 mask+0.05: TH13(10.1,-14.5) TH14(10,15.4) TH15(-0.2,-24.9) TH15(-0.2,25.6)
  silkscreen extent 1.6,-24.6 9.8,25.9, body extent -0.7,-25.1 10.3,25.9, height 30.51
AMASS_XT60-M [mm]
  round 6 hole 4.55: N(3.6,0)
  rect 6x6 / inner round 6 / far side rect 6x6 hole 4.55: P(-3.6,0)
  silkscreen extent -9.5,-4.05 9.5,4.05, body extent -7.75,-4.05 7.75,4.05, height 16
BOUR-3362P [mm] "THD, 3-Leads, Body 6.6x6.99mm, Pitch 2.54mm"
  rect 1.25x1.25 hole 0.75: 1(-2.54,0.035)
  round 1.25 hole 0.75: 2(0,2.575) 3(2.54,0.035)
  silkscreen extent -4.03,-3.49 3.3,3.5, body extent -3.3,-3.49 3.3,3.49, height 4.95
"CAP TH ALUM ELEC D5.00mm S2.00mm H11.00mm" [mm] "5mm Diameter 2mm Lead Spacing Aluminum Electrolytic Capacitors Radial, Can"
  oval 1.3x1.95 hole 0.7: 1(1,0) 2(-1,0)
  silkscreen extent -2.5,-2.5 2.5,2.5, body extent -2.51,-2.5 2.5,2.5, height 11
"CAP TH ALUM ELEC D10.00mm S5.00mm H20.00mm" [mm] "10mm Diameter 5mm Lead Spacing Aluminum Electrolytic Capacitors Radial, Can"
  oval 1.4x2.1 hole 0.8: 1(2.5,0) 2(-2.5,0)
  silkscreen extent -5,-5 5,5, body extent -5.01,-5 5,5, height 20
"CAP: 0805" [mm]
  rect 1x1.25 smd: 1(-1,0) 2(1,0)
  silkscreen extent -1.7,-0.82 1.7,0.83, body extent -1,-0.62 1,0.63, height 0.78
"CAP: 1206" [mm]
  rect 1x1.6 smd: 1(-1.5,0) 2(1.5,0)
  silkscreen extent -2.2,-1 2.2,1, body extent -1.6,-0.8 1.6,0.8, height 1
"CAP: 2220" [mm]
  rect 5x1.5 smd: 1(0,0) 2(0,-4.8)
  silkscreen extent -2.5,-3.75 2.5,-1, body extent -2.5,-5.25 2.5,0.45, height 2.3
DS1014-20S [mm] "BH2-20 pitch 2mm, 2x20"
  rect 1.3x1.3 hole 0.8: 1(0,0)
  round 1.3 hole 0.8: 2(0,2) 3(2,0) 4(2,2) 5(4,0) 6(4,2) 7(6,0) 8(6,2) 9(8,0) 10(8,2) 11(10,0) 12(10,2) 13(12,0) 14(12,2) 15(14,0) 16(14,2) 17(16,0) 18(16,2) 19(18,0) 20(18,2)
  silkscreen extent -4.55,-2.4 22.55,3.7, body extent -4.75,-1.7 22.75,3.7, height 5.6
DS1021-1x3S [mm]
  rect 1.65x1.65 hole 1.1: 1(0,0)
  round 1.65 hole 1.1: 2(-2.54,0) 3(-5.08,0)
  silkscreen extent -6.6,-1.44 1.52,1.44, body extent -6.35,-1.25 1.27,1.25, height 5.75
GSIB-5S [mm]
  rect 2.13x2.13 hole 1.5: 1(0,0)
  round 2.13 hole 1.5: 2(10,0) 3(17.5,0) 4(25,0)
  silkscreen extent -3.1,-1.55 27.5,3.05, body extent -2.5,-1.55 27.5,3.05, height 24.3
HS15 [mm]
  round 3.5 hole 1.8 mask+0.05: 1(-8.6,4.8) 2(22.2,4.8)
  round 3.15 / inner round 1.524 / far side round 3.15 hole 2.642 paste-2539.97 mask+0: OTV(0,0) OTV(14.3,15.9)
  silkscreen extent -11.23,-2.8 25.53,18.58, body extent -11,-2.5 25.5,18.5, height 11.01
LEPESTOK7750224 [mm]
  rrect50% 1.6x1.6 hole 0.9: 1(0,0)
OTV13 [mm]
  round 1.8 hole 1.3: 1(0,0)
SOD-123F [mm] "SMD"
  rrect25% 1.1x1.1 smd: 1(-1.7,0) 2(1.7,0)
  silkscreen extent -2.6,-1 1.83,1, body extent -1.9,-0.8 1.9,0.8, height 1
SOD-323 [mm]
  rect 1.085x0.55 smd: 1(-1.14,0) 2(1.14,0)
  silkscreen extent -1.68,-0.64 0.83,0.64, body extent -1.25,-0.62 1.25,0.62, height 1.15
SOD-323F [mm]
  rect 1.006x0.392 smd paste+0 mask+0: 1(-1,0)
  rrect100% 1.006x0.392 smd paste+0 mask+0: 2(1,0)
  silkscreen extent -1.46,-0.65 0.85,0.82, body extent -1.6,-0.73 1.6,0.72, height 0.25
SOT-23-3 [mm]
  rect 1.05x0.7 smd: 1(0,0) 2(0,-1.9) 3(2.3,-0.95)
  silkscreen extent -0.53,-2.41 1.43,0.6, body extent -0.05,-2.41 2.35,0.51, height 1.2
SOT-23-6 [mm] "pitch 0.95 mm"
  rect 1.1x0.6 smd: 1(-1.3,0.95) 2(-1.3,0) 3(-1.3,-0.95) 4(1.3,-0.95) 5(1.3,0) 6(1.3,0.95)
  round 0.5 on Mech1: ""(-1,1.1)
  silkscreen extent -1.42,-1.3 0.25,1.82, body extent -1.4,-1.45 1.4,1.45, height 1.45
TO-220(F) [mm] "TO-220 переформованный"
  round 2 hole 1.2: 1(-2.5,0) 2(0,-2.5) 3(2.5,0)
  silkscreen extent -5.15,-1.95 5.25,2.8, body extent -5,-2.8 5.2,2.7, height 22.06
TO-220(f) [mm] "TO-220 переформованный"
  round 2 hole 1.2: 1(-2.5,0) 2(0,-2.5) 3(2.5,0)
  silkscreen extent -5.15,-1.95 5.25,2.8, body extent -5,-2.8 5.2,2.7, height 22.06
WOM [mm]
  rect 1.55x1.55 hole 1: 1(-2.55,-2.55)
  round 1.55 hole 1: 2(2.55,-2.55) 3(2.55,2.55) 4(-2.55,2.55)
  silkscreen extent -5,-5 5,5, body extent -4.43,-4.42 4.42,4.42, height 5.25
"С2-33Н-0,25АИ (220.03.0401.00.00)" [mm] "Резисторы постоянные непроволочные прецизионные С2-29Н АИ, производитель \"АО\"НПО\"ЭРКОН\""
  round 1.5 hole 0.8: 1(-1.25,0) 2(1.25,0)
  silkscreen extent -2.4,-1.15 2.4,1.15, body extent -1.55,-1.1 2.35,1.1, height 9.3

## Part data
C45 C46: "KM220M2EBKJ1020VBK, 22uF, 105C,10x20"
DA1 DA4 DA6 DA8 DA9 DA13: "iCoupler Digital Isolator"
DA2 DA3 DA5: "Isolated RS-485 Transceiver,  20 Mbps data rate, SOIC-16-W"
DA10: "12-Bit High Bandwidth / Multiplying DACs with Serial Interface 10-MSOP"
DA11 DA12 DA19: "30 V, Low Noise, Rail-to-Rail Input/Output, / Low Power Operational Amplifiers"
DA14: library part ADG433BR_1, "LC2MOS Precision Quad SPST Switches"
DA15 DA16: "High Voltage Power Operational Amplifier"
DA20 DA21: "High Perfomance Voltage Comparartor"
DD1 DD3: "Quad 2-Input NAND Gate High-Performance Silicon-Gate CMOS."
DD2: library part IN74HC20D_1, "Dual 4-input  NAND Gate CMOS"
kt?? КТ1 КТ2 КТ3 КТ4 КТ5 КТ6 КТ7 КТ8 КТ9 КТ10 КТ11 КТ12: library part Lepestok
RP1: "3362 -1/4 ˝ Square Trimpot® Trimming Potentiometer"
RP2 RP3: "Variable Resistor 1kOm"
VD1 VD2 VD3 VD4: "Small Signal Fast Switching Diod"
VD11 VD12: "General Purpose Plastic Rectifier"
VD13: "Диод W04M"
VD14: "Диод GSIB2540"
VD15 VD16: "Стабилитрон BZT52C10"
VT1: "MOSFET, N, SOT-23-6; Transistor Type: MOSFET; Transistor Polarity: N; Voltage, Vds Typ: 100V; Current, Id Cont: 1.5A;"
VT2: "P-Channel 100 V 0.35 Ohm Power MOSFET Surface Mount - SOT-23-6"
VT4: "Single N-Channel 100 V 8.3 mOhm 37 nC OptiMOS Power Mosfet - TO-220-3"
XP1: "pitch 2mm, 20 pin 2x10"
XP2 XP3: library part DS1021-1x3_1, "PLS-3, 2.54 pitch"
XP4 XP5: "Connector", System=Connector
XP7: "Plug; DC supply; XT60; male; PIN: 2; for cable; soldered; 30A; 500V", Package=Package, Check_prices=https://www.snapeda.com/parts/XT60-M/AMASS/view-part/?ref=eda, MF=AMASS, MP=XT60-M, SnapEDA_Link=https://www.snapeda.com/parts/XT60-M/AMASS/view-part/?ref=snap
R1 R2 R3 R4 R5 R6 R7 R8 R9 R10 R11 R12 R13 R14 R15 R16 R17 R18 R19 R20 R21 R22 R23 R24 R25 R26 R27 R28 R29 R30 R31 R32 R33 R34 R35 R36 R39 R42 R44 R45 R46 R47 R48 R49 R50 R51 R52 R53 R54 R55 R56 R59 R60 R61 R62 R63 R64 R65 R66 R67 R70 R71 R72 R73 R74: ModelPrint=1206
R57 R58 R68 R69: ModelPrint=2512
R75 R76: Диапазон значений номинальных сопротивлений="от 1 Ом до 3,01 МОм", Категории качества=«ОТК», Номинальная мощность рассеяния="0,125 Вт", Ряд сопротивлений="Е24, Е96", ТУ="ОЖО.467.173 ТУ"
R77 R78: Диапазон значений номинальных сопротивлений="от 0,1 Ом до 3,01 МОм", Категории качества=«ОТК», Номинальная мощность рассеяния="0,25 Вт", Ряд сопротивлений="Е24, Е96", ТУ="ОЖО.467.173 ТУ"
XP6: System=Connector

## Free pads (board coordinates)
  round 6 hole 3.5 unplated: 1(5,5) 1(5,75) 1(5,145) 1(105,5.1) 1(105,75) 1(105,145)
  round 3.5 hole 1.8 mask+0.05: 1(81.339,139.606) 4(97.585,84.568) 7(31.338,139.606) TH(75.9,26.7) TH(75.9,34.2) TH(75.9,41.7) TH(75.9,49.2) TH(75.9,56.7)
  round 2.5 hole 1.2 mask+0.05: 1(87.139,139.706) 2(73.839,139.606) 3(66.338,139.606) 5(46.339,139.606) 15(20.6,139) 20(53.003,139.703) 20(59.8,139.4) ""(38.838,139.606)
  round 1.2 hole 0.8 unplated: 6(32.5,23.2) 8(76.8,71.6) 9(87.9,71.3)
  round 1 smd mask+0.5: R(2,2) R(2,148) R(108,2.1) R(108,148) R1(2,10) R1(2,140) R1(10,2) R1(10,148) R1(100,2.1) R1(100,148) R1(108,10.1) R1(108,140)
  round 0 hole 3.5 unplated mask+0.05: TH5(103.736,84.568) TH7(81.339,145.49) TH12(31.338,145.55)
  round 0 hole 2.5 unplated mask+0.05: TH8(73.838,145.49) TH9(66.338,145.473) TH10(46.339,145.566) TH11(38.838,145.566)

## Via types
v1: diameter 0.6, hole 0.3, Top Layer to Bottom Layer, 155 vias
v2: diameter 0.8, hole 0.5, Top Layer to Bottom Layer, 6 vias

## Nets (pads, with @x,y where several pads share a name; then routed paths per layer and width w, separated by ;. In a path a pad name is that pad's centre, name@x,y a point inside that pad or via, vN(x,y) a via of type N, cw(c..) or ccw(c..) an arc to the next point about the centre after c; other vN are vias at no path point)
50E+: DA1.6 DD2.12 DD2.13 R65.1 | length 85.3
  Top Layer w0.2: DA1.6@29.467,35.569 30.398,36.5 30.8,36.5 31.9,35.4 v1@33.6,33.7 ; v1(33.6,33.5) v1@33.6,33.7 ; v1(42.7,33.2) 47.583,33.2 47.7,33.317 R65.1@47.7,34.3 ; v1(46.5,79.7) 46.5,80.692 47,81.192 47,81.2 47.59,81.79 DD2.13@48.5,81.79 DD2.12@48.5,83.06 ; v1(50.9,68) 43.6,68 38.403,62.803 38.403,47.252 36.151,45 35.852,45 33.6,42.748 33.6,39.702 v1@33.6,33.7
  Bottom Layer w0.2: v1(33.6,33.5) 42.4,33.5 v1(42.7,33.2) ; v1(46.5,79.7) 50.9,75.3 v1(50.9,68)
50E-: DA6.6 DD2.4 DD2.5 R66.2 | length 132.3
  Top Layer w0.2: DA6.6@17.567,33.669 19.698,35.8 22.4,35.8 28,41.4 v1(28,41.6) ; v1(29.9,41.7) 32.2,41.7 32.3,41.6 ; v1(33,35.1) 32.3,35.8 32.3,41.6 ; v1(45.1,32.1) 53.45,23.75 53.45,22.75 55.1,21.1 57.1,21.1 58.2,20 R66.2@69.2,20 ; v1(53.3,68.7) 43.4,68.7 38.053,63.353 38.053,57.753 38,57.7 38,47.344 37.856,47.2 37.557,47.2 33.25,42.893 33.25,42.65 32.3,41.7 32.3,41.6 ; DD2.5@54.4,85.6 DD2.4@54.4,84.33 55.362,84.33 55.392,84.3 v1(56.6,84.3)
  Bottom Layer w0.2: v1(28,41.6) 29.8,41.6 v1(29.9,41.7) ; v1(33,35.1) 32.8,34.9 32.8,32.8 33.1,32.5 44.7,32.5 v1(45.1,32.1) ; v1(53.3,68.7) 53,68.7 56.3,72 56.3,82.817 56.3,84 v1(56.6,84.3)
50En+: DA1.2 XP1.15 | length 25.6
  Top Layer w0.2: XP1.15@2.7,26 3.613,25.087 4.859,25.087 4.959,24.987 12.264,24.987 14.687,24.987 20.6,30.9 22.7,30.9 24.431,32.631 DA1.2@24.733,32.631
50En-: DA6.2 XP1.16 | length 10.1
  Top Layer w0.3: XP1.16@4.7,26 4.9,26.2 8.302,26.2 DA6.2@12.833,30.731
70+: pad.TH@75.9,49.2 VD14.2 | length 24.3
  Bottom Layer w2: VD14.2@57.6,62.8 71.7,48.7 75.4,48.7 pad.TH@75.9,49.2
70-: pad.TH@75.9,34.2 VD14.3 | length 39.5
  Bottom Layer w2: VD14.3@50.1,62.8 53.481,59.419 53.882,59.419 72,41.3 72,39.7 75.5,36.2 75.5,34.6 pad.TH@75.9,34.2
+3.3Vn: C3.2 C4.2 C6.2 C14.1 DA1.1 DA2.16 DA3.16 DA4.1 DA5.16 DA6.1 DA8.8 DA9.1 DA13.1 R1.2 R3.2 R5.2 XP1.9 XP1.12 XP1.19 | length 210.6
  Top Layer w0.3: XP1.12@4.7,30 XP1.9@2.7,32 1.6,30.9 1.6,25.3 1.8,25.1 2.256,25.1 2.306,25.05 2.994,25.05 3.65,24.394 3.65,23.606 3.65,22.95 XP1.19@2.7,22 2.8,21.9 2.8,19.6 9.629,19.6 v1(10.1,19.129) DA4.1@11.935,19.129 ; v1(10.1,30.4) 11.329,31.629 DA6.1@11.935,31.629 ; v1(10.2,39.9) 10.3,39.8 13.114,39.8 C14.1@13.707,40.393 14.629,41.315 DA8.8@14.629,42.935 ; v1(10.6,54.7) 12.317,54.7 R5.2@13.97,56.353 16.372,56.353 C6.2@16.9,55.825 ; DA3.16@14.17,87.42 14.237,87.42 14.3,87.484 15.819,87.484 16.599,86.703 16.599,84.098 R3.2@16.527,84.026 17.853,82.7 v1(21.3,82.7) ; DA5.16@17.506,58.427 16.9,57.821 C6.2@16.9,55.7 17.1,55.5 17.1,54.5 17.2,54.4 20.5,54.4 20.5,71 21.203,71.703 21.5,71.703 ; v1(21.4,75.8) 21.5,75.7 21.5,71.703 ; DA1.1@23.835,33.529 25.6,35.294 v1(25.6,37.8) ; DA13.1@23.835,45.629 25.7,47.494 25.7,50.2 v1(25.6,50.2) ; DA9.1@24.335,19.329 25.7,20.694 v1(25.7,22.8) ; C3.2@27,71.6 27,73.773 DA2.16@27.428,74.201 25.158,74.201 23.61,72.653 R1.2@23.61,71.703 21.5,71.703
  Bottom Layer w0.3: v1(10.6,54.7) 10.2,54.3 v1(10.2,39.9) 10.1,39.8 v1(10.1,30.4) v1(10.1,19.129) 10.1,12.876 10.276,12.7 25.524,12.7 25.7,12.876 v1(25.7,22.8) 25.6,22.9 v1(25.6,37.8) v1(25.6,50.2) ; v1(21.3,82.7) 21.3,75.9 v1(21.4,75.8)
+5V: ADG433.12 C2.1 C8.1 C9.1 C10.2 C11.2 C13.2 C18.1 C20.1 C39.1 C48.2 C54.1 DA1.8 DA2.1 DA3.1 DA4.8 DA5.1 DA6.8 DA8.1 DA9.8 DA10.8 DA11.8 DA13.8 DA14.12 DD1.14 DD2.14 DD3.14 R10.1 R11.1 R12.1 R52.2 R55.2 R70.2 XP5.3 | length 382.6
  Top Layer w0.3: DA10.8@11.025,104.8 11.895,104.8
  Top Layer w0.5: R10.1@9.8,100.2 9.8,100.05 10.05,99.8 10.3,99.8 13.05,102.55 ; v1(12,122.1) 12,120.717 DA11.8@12.012,120.705 ; 12.036,104.8 12.2,104.8 12.75,104.25 ; v1(12.6,104.7) 12.6,104.4 12.75,104.25 ; DA3.1@14.17,96.476 14.233,96.414 17.114,96.414 27.078,86.45 40.25,86.45 41.597,85.103 41.597,78.703 41.034,78.703 ; DA3.1@14.335,96.642 15.32,97.626 C13.2@15.32,99.583 15.32,100.28 13.05,102.55 ; v1(16.6,42.1) 16.6,42 18.465,43.865 DA8.1@18.465,46.771 17.694,46.771 17.558,46.634 16.957,46.634 16.821,46.771 16.229,46.771 14.3,48.7 14.3,51.977 16.023,53.7 16.8,53.7 24.8,53.7 26.9,55.8 26.9,56.2 ; v1(18.4,39.9) 17.193,38.693 C9.1@17.193,38.207 17.193,36.887 DA6.8@15.771,35.465 14.603,34.297 18.5,30.4 v1(19.1,30.4) ; v1(19.7,28.4) 19.7,28.2 17.493,25.993 C8.1@17.493,25.807 17.493,25.393 15.771,23.671 DA4.8@15.771,22.965 15,22.194 15,21.7 18.5,18.2 19.8,18.2 26.185,24.585 28.171,24.585 ; C20.1@28.893,52.107 27.671,50.885 DA13.8@27.671,49.465 26.906,48.7 26.906,47.894 28.893,45.907 C2.1@28.893,40.107 28.893,39.893 27.671,38.671 DA1.8@27.671,37.365 26.85,36.544 26.85,35.95 29.2,33.6 29.2,26.4 C18.1@29.593,26.007 28.171,24.585 ; C11.2@29.526,57.984 29.084,58.427 26.9,58.427 26.9,56.2 ; R11.1@29.809,69.111 34.011,69.111 ; C39.1@30.6,9.5 30.7,9.6 C48.2@30.7,13.8 30.7,17.11 30.3,17.51 30.3,17.581 30.215,17.666 30.215,18.685 27.5,21.4 27.5,22.494 DA9.8@28.171,23.165 28.171,24.585 ; R12.1@39.7,78.7 39.703,78.703 41.034,78.703 ; DD2.14@48.5,80.52 48.5,78.3 ; v1(53.4,96.7) 53.4,98.116 DA14.12@53.46,98.176 ; v1(60.8,96.4) 60.7,96.3 61.35,95.65 61.35,92.05 ; DD1.14@64.5,87.28 64.973,87.28 65.6,87.907 R55.2@65.6,89.8 R52.2@65.6,92.05 ; ADG433.12@64.635,72.612 64.635,74.335 v1(64.9,74.6) ; R52.2@65.6,92.3 65.35,92.05 61.35,92.05 ; v1(70.2,77.5) 69.4,78.3 61.35,78.3 ; v1(94.7,83.5) 94.7,85.6 R70.2@94.6,85.7 96.2,87.3 96.2,90 C54.1@96.1,90.1 96.2,90.2 96.2,99.8 96.44,100.04 DD3.14@98.4,100.04 ; 12.75,104.25 13.75,103.25 13.05,102.55 ; 26.9,56.2 31.3,56.2 34.011,58.911 34.011,69.111 ; 34.011,69.111 36.209,71.309 36.209,73.926 DA2.1@36.484,74.201 36.297,74.014 36.297,73.334 C10.2@39.449,73.334 41.034,73.334 41.034,77.8 ; 41.034,77.8 48,77.8 48.5,78.3 ; 41.034,77.8 41.034,78.703 ; 48.5,78.3 49.539,77.261 51.871,77.261 51.91,77.3 52.49,77.3 52.529,77.261 61.2,77.261 61.35,77.411 61.35,78.3 ; 61.35,78.3 61.35,92.05
  Bottom Layer w0.5: v1(12,122.1) 9.7,122.1 9.2,121.6 9.2,107.8 12.3,104.7 v1(12.6,104.7) ; v1(16.6,42.1) 18.4,40.3 v1(18.4,39.9) ; v1(19.1,30.4) 19.7,29.8 v1(19.7,28.4) ; C39.1@30.6,9.5 30.4,9.3 30.4,5.3 XP5.3@32.8,2.9 ; v1(53.4,96.7) 53.7,96.4 v1(60.8,96.4) ; v1(64.9,74.6) 65.1,74.4 70.654,74.4 72.654,76.4 ; v1(70.2,77.5) 71.3,76.4 72.654,76.4 ; v1(94.7,83.5) 94.6,83.5 87.5,76.4 72.654,76.4
+15V: ADG433.13 C12.1 C38.1 C41.1 C43.2 C47.2 C50.2 DA7.2 DA12.8 DA14.13 DA17.8 DA18.8 DA19.8 DA20.8 DA21.8 R18.2 XP5.2 | length 470.3
  Top Layer w0.3: 23,11.69 23.69,11 ; C47.2@23.05,9.3 23.65,9.3 23.69,9.26
  Top Layer w0.5: C12.1@4.3,129.7 C12.1@4.3,130 ; DA7.2@6.787,129.837 6.309,129.837 6.28,129.866 5.809,129.866 5.675,130 C12.1@4.3,130 ; DA12.8@11.412,113.105 13,113.105 13,112.3 14.1,111.2 16.5,111.2 16.6,111.1 ; C47.2@23,8.77 C47.2@23,8.57 ; C50.2@23.15,7.45 23,7.3 C38.1@23,3.2 23,2.875 24.475,1.4 28.76,1.4 XP5.2@30.26,2.9 31.6,4.24 46.36,4.24 v1(48.6,2) ; C47.2@23.175,8.745 C47.2@23,8.57 ; C50.2@23.3,7.6 C47.2@23.3,9.07 ; C47.2@23.4,8.97 23.69,9.26 23.69,10.31 23,11 23.69,11 ; DA18.8@39.095,102.812 39.095,104.495 v1(39.1,104.5) 40.2,105.6 44.1,105.6 44.4,105.9 44.4,110.8 48.356,114.756 51.5,114.756 51.5,121.9 49.9,123.5 49.9,132.1 R18.2@51.9,134.1 ; v1(42,92) 42.65,91.35 42.65,91.25 42.8,91.4 ; v1(43,80.2) 43,90.7 ; C41.1@43.7,92.1 43.7,91.975 43.125,91.4 43,91.4 43,90.7 ; v1(45.4,76.7) 46,76.1 v1(52,76.1) 67,76.1 v1(68.3,77.4) ; v1(51.9,0.7) 90.419,0.7 93.05,3.331 93.05,16.231 102.45,25.631 102.45,63.35 95.9,69.9 95.9,75.319 89.6,75.319 ; v1(52.4,82.9) 52.4,88.7 54.73,91.03 DA14.13@54.73,98.176 ; ADG433.13@63.365,72.612 63.4,72.647 v1(63.4,74.3) ; v1(72.5,77.5) 72.819,77.819 82.781,77.819 82.781,75.319 89.6,75.319 ; DA17.8@75.412,102.605 79.805,102.605 80.2,103 85.7,103 86.2,102.5 86.2,96.7 ; DA19.8@76.405,85.488 76.405,83.695 v1(76.5,83.6) ; DA20.8@88.712,96.611 88.623,96.7 86.2,96.7 ; DA21.8@91.112,82.905 89.905,82.905 89.4,82.4 ; C12.1@4.3,130 4.3,132.309 4.593,132.602 15.998,132.602 16.6,132 16.6,111.1 ; 16.6,111.1 16.6,107.3 18.2,105.7 23.4,105.7 31.9,97.2 31.9,94.2 35.5,90.6 42.9,90.6 43,90.7 ; C47.2@23,8.57 23,7.6 C47.2@23,8.57 ; 86.2,96.7 85.9,96.4 85.9,89 87.4,87.5 87.4,85.2 89.4,83.2 89.4,82.4 ; 89.4,82.4 89.4,76.4 89.6,76.2 89.6,75.319
  Bottom Layer w0.5: v1(39.1,104.5) 43.5,100.1 43.5,93.5 v1(42,92) ; v1(43,80.2) 45.4,77.8 v1(45.4,76.7) ; v1(48.6,2) 50,0.6 51.9,0.6 v1(51.9,0.7) ; v1(52,76.1) 52,82.5 v1(52.4,82.9) ; v1(63.4,74.3) 63.4,78.7 69.6,78.7 ; v1(68.3,77.4) 69.6,78.7 ; v1(72.5,77.5) 72.5,78.7 ; v1(76.5,83.6) 75.3,83.6 72.5,80.8 72.5,78.7 ; 69.6,78.7 72.5,78.7
+70V: 21.1 23.1 pad.1@81.339,139.606 pad.1@87.139,139.706 R77.1 VD9.1 | length 13.6
  Top Layer w1: pad.1@81.339,139.606 88.094,139.606 92.5,135.2 VD9.1@92.5,134.6
+100: 13.1 15.1 C45.1 pad.9 R53.2 R57.2 | length 110.9
  Top Layer w1: R53.2@53.5,3.6 84.9,3.6 87.4,6.1 87.4,17.7 98,28.3 98,51.9 95.5,54.4 R57.2@91.5,54.4 91.5,63.8 C45.1@88.2,67.1 ; C45.1@87.9,67.1 pad.9@87.9,71.3
+100V: C26.2 C30.2 DA15.3 DA16.3 pad.20@59.8,139.4 R49.1 | length 122.3
  Top Layer w0.8: 33.82,114.78 DA16.3@33.82,119 ; v1@81.19,113.29 DA15.3@81.19,119.6
  Top Layer w1: 33.82,114.78 v1(34.1,114.5) ; v1(44.9,118.6) 44.9,120.3 45.7,120.3 C30.2@45.8,120.2 ; v1(54.1,114) 57.1,114 v1(57.3,113.8) ; v1(68.4,118.2) C26.2@68.4,120.4 ; v1(81.1,113.2) v1@81.19,113.29 ; v1(91.6,118.6) 91.9,118.3 R49.1@91.9,116.5
  Bottom Layer w1: v1(34.1,114.5) 34.6,114 34.6,113.5 36.3,111.8 44.8,111.8 44.9,111.9 44.9,114 ; v1(44.9,118.6) 44.9,114 ; v1(54.1,114) 44.9,114 ; v1(57.3,113.8) 68.15,113.8 ; pad.20@59.8,139.4 61.1,139.4 71.6,128.9 71.6,118.2 v1(68.4,118.2) 68.4,114.05 68.15,113.8 ; v1(91.6,118.6) 84.7,111.7 82.6,111.7 v1(81.1,113.2) 80.9,113 70.9,113 70.1,113.8 68.15,113.8
-15V: ADG433.4 C40.2 C42.1 C44.1 C49.1 C51.1 DA12.4 DA14.4 DA17.4 DA18.4 DA19.4 DA20.4 DA21.4 R21.1 XP5.4 | length 415.9
  Top Layer w0.3: 14.625,8.85 14.625,7 C51.1@15.5,7 ; 14.625,8.9 C44.1@15.5,8.9
  Top Layer w0.5: DA12.4@5.988,109.295 5.988,108.712 v1(6.6,108.1) ; 14.625,8.85 14.625,10.6 C49.1@15.5,10.6 ; C51.1@15.5,7 C40.2@15.5,3.3 15.5,1.4 16.5,0.4 35.1,0.4 ; v1(18.9,106.7) 19.1,106.9 23.4,106.9 32.7,97.6 32.7,94.7 34,93.4 41.1,93.4 42.905,95.205 DA18.4@42.905,97.388 43.051,97.534 C42.1@45.3,97.534 ; XP5.4@35.34,2.9 35.34,0.4 35.1,0.4 ; C42.1@45.5,97.9 45.5,107.1 46.469,107.1 ; DA14.4@54.73,103.6 54.73,107.03 54.8,107.1 48.331,107.1 48.131,107.3 46.669,107.3 46.469,107.1 ; 54.815,107.1 62.3,107.1 62.847,106.553 62.847,99.953 66.4,96.4 66.9,96.4 ; R21.1@61.5,134.2 64.06,134.2 64.06,123.474 63.119,122.533 62.833,122.533 59,118.7 59,116.1 58.3,115.4 53.6,115.4 52.4,114.2 52.4,112.8 47.969,112.8 46.469,111.3 46.469,107.1 ; v1(63.2,65.8) 63.365,65.965 ADG433.4@63.365,67.188 ; DA17.4@69.591,98.795 68.7,97.904 68.7,96.4 66.9,96.4 ; v1(72.4,74.45) 72.4,74.4 v1@72.292,74.4 ; DA19.4@72.595,90.912 70.2,88.517 70.2,81.2 ; DA20.4@83.288,92.801 82.3,91.813 82.3,79.095 ; DA21.4@85.688,79.095 83.588,79.095 82.3,79.095 ; 35.1,0.4 49.5,0.4 51,1.9 90,1.9 91.9,3.8 91.9,16.7 101.3,26.1 101.3,61.5 93.6,69.2 93.6,74.4 v1@72.292,74.4 ; 66.9,96.4 66.9,81.2 70.2,81.2 ; 70.2,81.2 71.5,81.2 71.5,79.095 ; 71.5,79.095 71.5,74.4 v1@72.292,74.4 ; 71.5,79.095 82.3,79.095
  Bottom Layer w0.5: v1(6.6,108.1) 7.4,108.1 11.6,103.9 16.1,103.9 v1(18.9,106.7) ; v1(63.2,65.8) 63.2,65.75 63.45,65.5 v1(72.4,74.45)
  other v1: 14.277,7 14.277,8.9 14.277,10.6
-70V: 22.1 24.1 pad.15 R46.1 R78.2 VD8.1 XP7.N XP7.P | length 217
  Top Layer w2: R46.1@20.5,134.7 20.7,134.5 VD8.1@20.7,131.8 ; R46.1@20.6,134.8 pad.15@20.6,139 20.6,148.5 90.3,148.5 104.4,134.4 104.4,132.7 XP7.P@104.4,123.8
  Bottom Layer w2: pad.15@20.6,139 20.6,146.8 22.3,148.5 90.3,148.5 104.9,133.9 XP7.N@104.9,132.7
-100: 14.1 16.1 C46.2 pad.8 R54.2 R58.2 | length 112.8
  Top Layer w1: R54.2@53.5,7.6 84.4,7.6 84.4,18.4 95.3,29.3 95.3,51.3 85.6,51.3 85.5,51.4 85.5,54 R58.2@85.2,54.3 85.2,58.7 C46.2@76.8,67.1 pad.8@76.8,71.6
-100V: C29.1 C31.1 DA15.4 DA16.4 pad.20@53.003,139.703 | length 103.5
  Top Layer w0.8: v1@35.09,115.51 DA16.4@35.09,119 ; v1@82.46,114.94 DA15.4@82.46,119.6
  Top Layer w1: v1@35.09,115.51 v1(35.3,115.3) ; C31.1@45.7,135.1 48.4,135.1 pad.20@53.003,139.703 55,141.7 62.4,141.7 63.1,141 63.1,136.4 63.4,136.1 66.5,136.1 C29.1@67.5,135.1 67.7,135.3 69.8,135.3 v1(71.9,133.2) ; v1@82.46,114.94 v1(82.5,114.9)
  Bottom Layer w1: v1(35.3,115.3) 35.3,124.6 50.403,139.703 pad.20@53.003,139.703 ; v1(71.9,133.2) 73.9,131.2 73.9,117.1 75.2,115.8 81.6,115.8 v1(82.5,114.9)
CLK_DA2: DA3.3 DA10.4 | length 16.9
  Top Layer w0.2: v1(4.2,104.2) 4.3,104.3 DA10.4@6.575,104.3 ; v1(5.5,101.5) 5.7,101.7 7.7,101.7 8.4,101 8.4,99.07 8.8,98.67 11.63,98.67 DA3.3@11.63,96.476
  Bottom Layer w0.2: v1(4.2,104.2) 4.988,104.2 4.988,102.012 v1(5.5,101.5)
DAT_DA2: DA2.3 DA10.5 | length 65.8
  Top Layer w0.2: v1(3.7,101.2) 3.3,100.8 3.3,94.8 4.21,93.89 18.01,93.89 26.25,85.65 40.343,85.65 41.097,84.896 41.097,80.497 40.875,80.275 39.075,80.275 38.4,79.6 38.4,77.1 38.041,76.741 DA2.3@36.484,76.741 ; v1(4,103.2) 5.975,103.2 DA10.5@6.575,103.8
  Bottom Layer w0.2: v1(3.7,101.2) 3.7,102.655 4.245,103.2 v1(4,103.2)
EIMPn: DA9.2 XP1.17 | length 37.6
  Top Layer w0.2: v1(2.5,13.3) 2.5,12.6 12.563,12.6 12.615,12.547 12.822,12.547 12.875,12.6 19.402,12.6 DA9.2@25.233,18.431 ; v1(2.6,15.4) 2.6,16.4 1.5,17.5 1.5,22.8 XP1.17@2.7,24
  Bottom Layer w0.2: v1(2.5,13.3) 2.6,13.4 v1(2.6,15.4)